# EAGLE board DDR5-96GB-RDIMM (EAGLE 9.6.2)
96GB DDR5 Registered DIMM — Final

Size 133.35 x 33.53 mm. Coordinates in mm from the lower left corner, seen from the top.
Outline: 0,0 133.35,0 133.35,33.53 0,33.53 0,0
Copper layers used: 

## Footprints (pad centres in the part's own frame; a part is rotated, then mirrored left to right if it is on the bottom)
0402 = smd 0.356 x 0.457: 1 -0.381,0; 2 0.381,0
0805 = smd 0.457 x 0.559: 1 -0.635,0; 2 0.635,0
DDR5-288_Edge_Connector = smd 0.508 x 1.016: ALERT_n 49.454,-0.254; ALERT_n 49.454,0.254; CA0 -23.47,-0.254; CA0 33.528,-0.254; CA0 -23.47,0.254; CA0 33.528,0.254; CA1 -22.631,-0.254; CA1 34.366,-0.254; CA1 -22.631,0.254; CA1 34.366,0.254; CA2 -21.793,-0.254; CA2 35.204,-0.254; CA2 -21.793,0.254; CA2 35.204,0.254; CA3 -20.955,-0.254; CA3 36.043,-0.254; CA3 -20.955,0.254; CA3 36.043,0.254; CA4 -20.117,-0.254; CA4 36.881,-0.254; CA4 -20.117,0.254; CA4 36.881,0.254; CA5 -19.279,-0.254; CA5 37.719,-0.254; CA5 -19.279,0.254; CA5 37.719,0.254; CA6 -18.44,-0.254; CA6 38.557,-0.254; CA6 -18.44,0.254; CA6 38.557,0.254; CA7 -17.602,-0.254; CA7 39.395,-0.254; CA7 -17.602,0.254; CA7 39.395,0.254; CA8 -16.764,-0.254; CA8 40.234,-0.254; CA8 -16.764,0.254; CA8 40.234,0.254; CA9 -15.926,-0.254; CA9 41.072,-0.254; CA9 -15.926,0.254; CA9 41.072,0.254; CA10 -15.088,-0.254; CA10 41.91,-0.254; CA10 -15.088,0.254; CA10 41.91,0.254; CA11 -14.249,-0.254; CA11 42.748,-0.254; CA11 -14.249,0.254; CA11 42.748,0.254; CA12 -13.411,-0.254; CA12 43.586,-0.254; CA12 -13.411,0.254; CA12 43.586,0.254; CA13 -12.573,-0.254; CA13 44.425,-0.254; CA13 -12.573,0.254; CA13 44.425,0.254; CK_c -10.058,-0.254; CK_c -9.22,-0.254; CK_c 46.939,-0.254; CK_c 47.777,-0.254; CK_c -10.058,0.254; CK_c -9.22,0.254; CK_c 46.939,0.254; CK_c 47.777,0.254; CK_t -11.735,-0.254; CK_t -10.897,-0.254; CK_t 45.263,-0.254; CK_t 46.101,-0.254; CK_t -11.735,0.254; CK_t -10.897,0.254; CK_t 45.263,0.254; CK_t 46.101,0.254; CKE0 -6.706,-0.254; CKE0 -6.706,0.254; CKE1 -5.867,-0.254; CKE1 -5.867,0.254; CS0_n -8.382,-0.254; CS0_n -8.382,0.254; CS1_n -7.544,-0.254; CS1_n -7.544,0.254; DM0 -25.146,-0.254; DM0 -25.146,0.254; DM1 -24.308,-0.254; DM1 -24.308,0.254; DM2 31.852,-0.254; DM2 31.852,0.254; DM3 32.69,-0.254; DM3 32.69,0.254; DQ0 -55.321,-0.254; DQ0 -55.321,0.254; DQ1 -54.483,-0.254; DQ1 -54.483,0.254; DQ2 -53.645,-0.254; DQ2 -53.645,0.254; DQ3 -52.807,-0.254; DQ3 -52.807,0.254; DQ4 -51.968,-0.254; DQ4 -51.968,0.254; DQ5 -51.13,-0.254; DQ5 -51.13,0.254; DQ6 -50.292,-0.254; DQ6 -50.292,0.254; DQ7 -49.454,-0.254; DQ7 -49.454,0.254; DQ8 -48.616,-0.254; DQ8 -48.616,0.254; DQ9 -47.777,-0.254; DQ9 -47.777,0.254; DQ10 -46.939,-0.254; DQ10 -46.939,0.254; DQ11 -46.101,-0.254; DQ11 -46.101,0.254; DQ12 -45.263,-0.254; DQ12 -45.263,0.254; DQ13 -44.425,-0.254; DQ13 -44.425,0.254; DQ14 -43.586,-0.254; DQ14 -43.586,0.254; DQ15 -42.748,-0.254; DQ15 -42.748,0.254; DQ16 -41.91,-0.254; DQ16 -41.91,0.254; DQ17 -41.072,-0.254; DQ17 -41.072,0.254; DQ18 -40.234,-0.254; DQ18 -40.234,0.254; DQ19 -39.395,-0.254; DQ19 -39.395,0.254; DQ20 -38.557,-0.254; DQ20 -38.557,0.254; DQ21 -37.719,-0.254; DQ21 -37.719,0.254; DQ22 -36.881,-0.254; DQ22 -36.881,0.254; DQ23 -36.043,-0.254; DQ23 -36.043,0.254; DQ24 -35.204,-0.254; DQ24 -35.204,0.254; DQ25 -34.366,-0.254; DQ25 -34.366,0.254; DQ26 -33.528,-0.254; DQ26 -33.528,0.254; DQ27 -32.69,-0.254; DQ27 -32.69,0.254; DQ28 -31.852,-0.254; DQ28 -31.852,0.254; DQ29 -31.013,-0.254; DQ29 -31.013,0.254; DQ30 -30.175,-0.254; DQ30 -30.175,0.254; DQ31 -29.337,-0.254; DQ31 -29.337,0.254; DQ32 1.676,-0.254; DQ32 1.676,0.254; DQ33 2.515,-0.254; DQ33 2.515,0.254; DQ34 3.353,-0.254; DQ34 3.353,0.254; DQ35 4.191,-0.254; DQ35 4.191,0.254; DQ36 5.029,-0.254; DQ36 5.029,0.254; DQ37 5.867,-0.254; DQ37 5.867,0.254; DQ38 6.706,-0.254; DQ38 6.706,0.254; DQ39 7.544,-0.254; DQ39 7.544,0.254; DQ40 8.382,-0.254; DQ40 8.382,0.254; DQ41 9.22,-0.254; DQ41 9.22,0.254; DQ42 10.058,-0.254; DQ42 10.058,0.254; DQ43 10.897,-0.254; DQ43 10.897,0.254; DQ44 11.735,-0.254; DQ44 11.735,0.254; DQ45 12.573,-0.254; DQ45 12.573,0.254; DQ46 13.411,-0.254; DQ46 13.411,0.254; DQ47 14.249,-0.254; DQ47 14.249,0.254; DQ48 15.088,-0.254; DQ48 15.088,0.254; DQ49 15.926,-0.254; DQ49 15.926,0.254; DQ50 16.764,-0.254; DQ50 16.764,0.254; DQ51 17.602,-0.254; DQ51 17.602,0.254; DQ52 18.44,-0.254; DQ52 18.44,0.254; DQ53 19.279,-0.254; DQ53 19.279,0.254; DQ54 20.117,-0.254; DQ54 20.117,0.254; DQ55 20.955,-0.254; DQ55 20.955,0.254; DQ56 21.793,-0.254; DQ56 21.793,0.254; DQ57 22.631,-0.254; DQ57 22.631,0.254; DQ58 23.47,-0.254; DQ58 23.47,0.254; DQ59 24.308,-0.254; DQ59 24.308,0.254; DQ60 25.146,-0.254; DQ60 25.146,0.254; DQ61 25.984,-0.254; DQ61 25.984,0.254; DQ62 26.822,-0.254; DQ62 26.822,0.254; DQ63 27.661,-0.254; DQ63 27.661,0.254; DQS0_t -28.499,-0.254; DQS0_t -27.661,-0.254; DQS0_t -28.499,0.254; DQS0_t -27.661,0.254; DQS1_c -26.822,-0.254; DQS1_c -25.984,-0.254; DQS1_c -26.822,0.254; DQS1_c -25.984,0.254; DQS2_t 28.499,-0.254; DQS2_t 29.337,-0.254; DQS2_t 28.499,0.254; DQS2_t 29.337,0.254; DQS3_c 30.175,-0.254; DQS3_c 31.013,-0.254; DQS3_c 30.175,0.254; DQS3_c 31.013,0.254; EVENT_n 50.292,-0.254; EVENT_n 50.292,0.254; HSA 52.807,-0.254; HSA 52.807,0.254; ODT0 -5.029,-0.254; ODT0 -5.029,0.254; ODT1 -4.191,-0.254; ODT1 -4.191,0.254; RESET_n 48.616,-0.254; RESET_n 48.616,0.254; SA0 53.645,-0.254; SA0 53.645,0.254; SA1 54.483,-0.254; SA1 54.483,0.254; SCL 51.968,-0.254; SCL 51.968,0.254; SDA 51.13,-0.254; SDA 51.13,0.254; VDD -58.674,-0.254; VDD -57.836,-0.254; VDD -1.676,-0.254; VDD 0.838,-0.254; VDD 56.998,-0.254; VDD 57.836,-0.254; VDD -58.674,0.254; VDD -57.836,0.254; VDD -1.676,0.254; VDD 0.838,0.254; VDD 56.998,0.254; VDD 57.836,0.254; VDDQ -56.998,-0.254; VDDQ -56.159,-0.254; VDDQ -3.353,-0.254; VDDQ -2.515,-0.254; VDDQ 55.321,-0.254; VDDQ 56.159,-0.254; VDDQ -56.998,0.254; VDDQ -56.159,0.254; VDDQ -3.353,0.254; VDDQ -2.515,0.254; VDDQ 55.321,0.254; VDDQ 56.159,0.254; VSS -60.35,-0.254; VSS -59.512,-0.254; VSS -0.838,-0.254; VSS 0,-0.254; VSS 58.674,-0.254; VSS 59.512,-0.254; VSS -60.35,0.254; VSS -59.512,0.254; VSS -0.838,0.254; VSS 0,0.254; VSS 58.674,0.254; VSS 59.512,0.254
1210 = smd 0.457 x 0.559: 1 -0.635,0; 2 0.635,0
1008 = smd 0.457 x 0.559: 1 -0.635,0; 2 0.635,0
BGA-48_DDR5_SDRAM = smd 0.406 x 0.406: CA0 -1.956,-0.381; CA1 -1.168,-0.381; CA2 -0.381,-0.381; CA3 0.406,-0.381; CA4 1.194,-0.381; CA5 1.981,-0.381; CA6 -1.956,0.406; CA7 -1.168,0.406; CA8 -0.381,0.406; CA9 0.406,0.406; CA10 1.194,0.406; CA11 1.981,0.406; CA12 -1.168,1.981; CA13 -0.381,1.981; CK_c -1.168,1.194; CK_t -1.956,1.194; CKE 0.406,1.194; CS -0.381,1.194; DM 0.406,-1.168; DQ0 -1.168,-2.743; DQ1 -0.381,-2.743; DQ2 0.406,-2.743; DQ3 1.194,-2.743; DQ4 -1.168,-1.956; DQ5 -0.381,-1.956; DQ6 0.406,-1.956; DQ7 1.194,-1.956; DQ8 -1.168,2.769; DQ9 -0.381,2.769; DQ10 0.406,2.769; DQ11 1.194,2.769; DQS_c -0.381,-1.168; DQS_t -1.168,-1.168; ODT 1.194,1.194; RESET 1.981,1.194; VDD -1.956,-2.743; VDD -1.956,-1.956; VDD -1.956,1.981; VDD -1.956,2.769; VDDQ -1.956,-1.168; VDDQ 1.981,-1.168; VPP 0.406,1.981; VSS 1.981,-2.743; VSS 1.981,-1.956; VSS 1.981,1.981; VSS 1.981,2.769; VSSQ 1.194,-1.168; ZQ 1.194,1.981
BGA-144_RCD02 = smd 0.406 x 0.406: ALERT_n 2.032,-1.016; BCOM 2.032,-0.254; CA_A0 -2.54,-2.54; CA_A1 -1.778,-2.54; CA_A2 -1.016,-2.54; CA_A3 -0.254,-2.54; CA_A4 0.508,-2.54; CA_A5 1.27,-2.54; CA_A6 2.032,-2.54; CA_B0 -2.54,-1.778; CA_B1 -1.778,-1.778; CA_B2 -1.016,-1.778; CA_B3 -0.254,-1.778; CA_B4 0.508,-1.778; CA_B5 1.27,-1.778; CA_B6 2.032,-1.778; CK_c0 -1.778,-1.016; CK_c1 -0.254,-1.016; CK_t0 -2.54,-1.016; CK_t1 -1.016,-1.016; CS0 0.508,-1.016; CS1 1.27,-1.016; DCS0_A -2.54,0.508; DCS0_B -1.016,0.508; DCS1_A -1.778,0.508; DCS1_B -0.254,0.508; QCA_A0 -1.778,1.27; QCA_A1 -1.016,1.27; QCA_A2 -0.254,1.27; QCA_A3 0.508,1.27; QCA_A4 1.27,1.27; QCA_A5 2.032,1.27; QCA_A6 -2.54,2.032; QCA_B0 -1.778,2.032; QCA_B1 -1.016,2.032; QCA_B2 -0.254,2.032; QCA_B3 0.508,2.032; QCA_B4 1.27,2.032; QCA_B5 2.032,2.032; QCA_B6 -2.54,2.54; QCK_c0 1.27,0.508; QCK_c1 -2.54,1.27; QCK_t0 0.508,0.508; QCK_t1 2.032,0.508; VDD -2.54,-0.254; VDD -1.778,-0.254; VDD 0.508,-0.254; VSS -1.016,-0.254; VSS -0.254,-0.254; VSS 1.27,-0.254
QFN-40_PMIC = smd 0.356 x 0.356: AGND 0.254,-1.016; PGND -1.27,-1.016; PGND -0.508,-1.016 | smd 0.356 x 0.508: EN 1.016,2.032; PVDD_A -0.508,-2.032; PVDD_B 0.254,-2.032; SCL -0.508,2.032; SDA -1.27,2.032; SMBALERT 0.254,2.032; VDD_OUT 1.016,-2.032; VDDQ_OUT 1.778,-2.032; VIN -2.032,-2.032; VIN -1.27,-2.032 | smd 2.032 x 2.032: EPAD 0,0 | smd 0.508 x 0.356: FB_VDD 2.032,-1.016; FB_VDDQ 2.032,0; FB_VPP 2.032,1.016; SW_A -2.032,0; SW_B -2.032,1.016; VPP_OUT -2.032,-1.016
TSSOP-8_SPD_Hub = smd 0.406 x 0.66: HSA 1.397,-0.635; SA0 -1.397,-1.905; SA1 -1.397,1.905; SCL -1.397,0.635; SDA -1.397,-0.635; VDD 1.397,-1.905; VSS 1.397,0.635; WP 1.397,1.905

## Placement (x,y rotation side)
C1  100nF  [0402]  4.83,14.35 0 top
C2  100nF  [0402]  6.35,14.35 0 top
C3  100nF  [0402]  15.93,14.35 0 top
C4  100nF  [0402]  17.45,14.35 0 top
C5  100nF  [0402]  27.03,14.35 0 top
C6  100nF  [0402]  28.55,14.35 0 top
C7  100nF  [0402]  38.13,14.35 0 top
C8  100nF  [0402]  39.65,14.35 0 top
C9  100nF  [0402]  49.23,14.35 0 top
C10  100nF  [0402]  50.75,14.35 0 top
C11  100nF  [0402]  60.33,14.35 0 top
C12  100nF  [0402]  61.85,14.35 0 top
C13  100nF  [0402]  71.42,14.35 0 top
C14  100nF  [0402]  72.95,14.35 0 top
C15  100nF  [0402]  82.52,14.35 0 top
C16  100nF  [0402]  84.05,14.35 0 top
C17  100nF  [0402]  93.62,14.35 0 top
C18  100nF  [0402]  95.15,14.35 0 top
C19  100nF  [0402]  104.72,14.35 0 top
C20  100nF  [0402]  106.25,14.35 0 top
C21  100nF  [0402]  115.82,14.35 0 top
C22  100nF  [0402]  117.35,14.35 0 top
C23  100nF  [0402]  126.92,14.35 0 top
C24  100nF  [0402]  128.45,14.35 0 top
C25  100nF  [0402]  4.83,14.35 0 bottom
C26  100nF  [0402]  6.35,14.35 0 bottom
C27  100nF  [0402]  15.93,14.35 0 bottom
C28  100nF  [0402]  17.45,14.35 0 bottom
C29  100nF  [0402]  27.03,14.35 0 bottom
C30  100nF  [0402]  28.55,14.35 0 bottom
C31  100nF  [0402]  38.13,14.35 0 bottom
C32  100nF  [0402]  39.65,14.35 0 bottom
C33  100nF  [0402]  49.23,14.35 0 bottom
C34  100nF  [0402]  50.75,14.35 0 bottom
C35  100nF  [0402]  60.33,14.35 0 bottom
C36  100nF  [0402]  61.85,14.35 0 bottom
C37  100nF  [0402]  71.42,14.35 0 bottom
C38  100nF  [0402]  72.95,14.35 0 bottom
C39  100nF  [0402]  82.52,14.35 0 bottom
C40  100nF  [0402]  84.05,14.35 0 bottom
C41  100nF  [0402]  93.62,14.35 0 bottom
C42  100nF  [0402]  95.15,14.35 0 bottom
C43  100nF  [0402]  104.72,14.35 0 bottom
C44  100nF  [0402]  106.25,14.35 0 bottom
C45  100nF  [0402]  115.82,14.35 0 bottom
C46  100nF  [0402]  117.35,14.35 0 bottom
C47  100nF  [0402]  126.92,14.35 0 bottom
C48  100nF  [0402]  128.45,14.35 0 bottom
C49  100nF  [0402]  62.48,7.87 0 top
C50  100nF  [0402]  70.87,7.87 0 top
C51  47nF  [0402]  62.48,12.45 0 top
C52  47nF  [0402]  70.87,12.45 0 top
C53  10uF  [0402]  53.34,13.84 0 top
C54  10uF  [0402]  57.4,7.62 0 top
C55  100nF  [0402]  49.28,12.7 0 top
C56  100nF  [0402]  57.4,12.7 0 top
C57  22uF  [0402]  37.85,8.38 0 top
C58  22uF  [0402]  37.85,10.92 0 top
C59  22uF  [0402]  37.85,13.46 0 top
C60  100nF  [0402]  78.74,13.84 0 top
C61  100nF  [0402]  80.52,13.84 0 top
C62  47uF  [0805]  47.24,6.6 0 top
C63  47uF  [0805]  53.34,6.1 0 top
C64  22uF  [0805]  41.15,8.38 0 top
C65  22uF  [0805]  41.15,10.92 0 top
C66  10uF  [0805]  35.31,12.19 0 top
J1  DDR5-288  [DDR5-288_Edge_Connector]  66.67,1.27 0 top
L1  470nH  [1210]  47.75,9.27 0 top
L2  470nH  [1210]  44.45,10.92 0 top
L3  1uH  [1008]  44.45,13.46 0 top
R1  2.2k  [0402]  74.93,6.35 0 top
R2  2.2k  [0402]  74.93,8.64 0 top
R3  10k  [0402]  60.45,7.62 0 top
R4  10k  [0402]  78.23,5.59 0 top
R5  0R  [0402]  85.09,6.35 0 top
R6  0R  [0402]  85.09,8.64 0 top
R7  47R  [0402]  86.36,13.21 0 top
R8  47R  [0402]  89.92,13.21 0 top
R9  47R  [0402]  93.47,12.06 0 top
R10  47R  [0402]  97.03,12.06 0 top
U1  4GB DDR5  [BGA-48_DDR5_SDRAM]  5.59,22.1 0 top
U2  4GB DDR5  [BGA-48_DDR5_SDRAM]  16.69,22.1 0 top
U3  4GB DDR5  [BGA-48_DDR5_SDRAM]  27.79,22.1 0 top
U4  4GB DDR5  [BGA-48_DDR5_SDRAM]  38.89,22.1 0 top
U5  4GB DDR5  [BGA-48_DDR5_SDRAM]  49.99,22.1 0 top
U6  4GB DDR5  [BGA-48_DDR5_SDRAM]  61.09,22.1 0 top
U7  4GB DDR5  [BGA-48_DDR5_SDRAM]  72.19,22.1 0 top
U8  4GB DDR5  [BGA-48_DDR5_SDRAM]  83.29,22.1 0 top
U9  4GB DDR5  [BGA-48_DDR5_SDRAM]  94.39,22.1 0 top
U10  4GB DDR5  [BGA-48_DDR5_SDRAM]  105.49,22.1 0 top
U11  4GB DDR5  [BGA-48_DDR5_SDRAM]  116.59,22.1 0 top
U12  4GB DDR5  [BGA-48_DDR5_SDRAM]  127.69,22.1 0 top
U13  4GB DDR5  [BGA-48_DDR5_SDRAM]  5.59,22.1 0 bottom
U14  4GB DDR5  [BGA-48_DDR5_SDRAM]  16.69,22.1 0 bottom
U15  4GB DDR5  [BGA-48_DDR5_SDRAM]  27.79,22.1 0 bottom
U16  4GB DDR5  [BGA-48_DDR5_SDRAM]  38.89,22.1 0 bottom
U17  4GB DDR5  [BGA-48_DDR5_SDRAM]  49.99,22.1 0 bottom
U18  4GB DDR5  [BGA-48_DDR5_SDRAM]  61.09,22.1 0 bottom
U19  4GB DDR5  [BGA-48_DDR5_SDRAM]  72.19,22.1 0 bottom
U20  4GB DDR5  [BGA-48_DDR5_SDRAM]  83.29,22.1 0 bottom
U21  4GB DDR5  [BGA-48_DDR5_SDRAM]  94.39,22.1 0 bottom
U22  4GB DDR5  [BGA-48_DDR5_SDRAM]  105.49,22.1 0 bottom
U23  4GB DDR5  [BGA-48_DDR5_SDRAM]  116.59,22.1 0 bottom
U24  4GB DDR5  [BGA-48_DDR5_SDRAM]  127.69,22.1 0 bottom
U25  RCD02  [BGA-144_RCD02]  66.67,10.16 0 top
U26  PMIC5100  [QFN-40_PMIC]  53.34,10.16 0 top
U27  SPD5118  [TSSOP-8_SPD_Hub]  80.01,10.16 0 top

## Library data of the parts
C1-C66 J1 L1-L3 R1-R10 U1-U27 = pcb-layout

## Nets
ALERT_n: J1.ALERT_n U25.ALERT_n
CAA0: U1.CA0 U2.CA0 U3.CA0 U4.CA0
CAA1: U1.CA1 U2.CA1 U3.CA1 U4.CA1
CAA2: U1.CA2 U2.CA2 U3.CA2 U4.CA2
CAA3: U1.CA3 U2.CA3 U3.CA3 U4.CA3
CAA4: U1.CA4 U2.CA4 U3.CA4 U4.CA4
CAA5: U1.CA5 U2.CA5 U3.CA5 U4.CA5
CAA6: U1.CA6 U2.CA6 U3.CA6 U4.CA6
CAA7: U1.CA7 U2.CA7 U3.CA7 U4.CA7
CAA8: U1.CA8 U2.CA8 U3.CA8 U4.CA8
CAA9: U1.CA9 U2.CA9 U3.CA9 U4.CA9
CAA10: U1.CA10 U2.CA10 U3.CA10 U4.CA10
CAA11: U1.CA11 U2.CA11 U3.CA11 U4.CA11
CAA12: U1.CA12 U2.CA12 U3.CA12 U4.CA12
CAA13: U1.CA13 U2.CA13 U3.CA13 U4.CA13
CAB0: U1.CA0 U2.CA0 U3.CA0 U4.CA0
CAB1: U1.CA1 U2.CA1 U3.CA1 U4.CA1
CAB2: U1.CA2 U2.CA2 U3.CA2 U4.CA2
CAB3: U1.CA3 U2.CA3 U3.CA3 U4.CA3
CAB4: U1.CA4 U2.CA4 U3.CA4 U4.CA4
CAB5: U1.CA5 U2.CA5 U3.CA5 U4.CA5
CAB6: U1.CA6 U2.CA6 U3.CA6 U4.CA6
CAB7: U1.CA7 U2.CA7 U3.CA7 U4.CA7
CAB8: U1.CA8 U2.CA8 U3.CA8 U4.CA8
CAB9: U1.CA9 U2.CA9 U3.CA9 U4.CA9
CAB10: U1.CA10 U2.CA10 U3.CA10 U4.CA10
CAB11: U1.CA11 U2.CA11 U3.CA11 U4.CA11
CAB12: U1.CA12 U2.CA12 U3.CA12 U4.CA12
CAB13: U1.CA13 U2.CA13 U3.CA13 U4.CA13
CB0: U1.DQ0 U2.DQ0
CB1: U1.DQ0 U2.DQ0
CB2: U1.DQ0 U2.DQ0
CB3: U1.DQ0 U2.DQ0
CB4: U1.DQ0 U2.DQ0
CB5: U1.DQ0 U2.DQ0
CB6: U1.DQ0 U2.DQ0
CB7: U1.DQ0 U2.DQ0
CK_A0_c: U1.CK_c U2.CK_c
CK_A0_t: U1.CK_t U2.CK_t
CK_A1_c: U1.CK_c U2.CK_c
CK_A1_t: U1.CK_t U2.CK_t
CK_B0_c: U1.CK_c U2.CK_c
CK_B0_t: U1.CK_t U2.CK_t
CK_B1_c: U1.CK_c U2.CK_c
CK_B1_t: U1.CK_t U2.CK_t
CKE0: J1.CKE0
CKE1: J1.CKE1
CS0_n: J1.CS0_n
CS1_n: J1.CS1_n
DM0: J1.DM0
DM1: J1.DM1
DM2: J1.DM2
DM3: J1.DM3
DM4: U1.DM U2.DM U3.DM U4.DM
DM5: U1.DM U2.DM U3.DM U4.DM
DM6: U1.DM U2.DM U3.DM U4.DM
DM7: U1.DM U2.DM U3.DM U4.DM
DQ0: U1.DQ0 U2.DQ0 U3.DQ0 U4.DQ0 U5.DQ0 U6.DQ0 U7.DQ0 U8.DQ0 U9.DQ0 U10.DQ0 U11.DQ0 U12.DQ0 U13.DQ0 U14.DQ0 U15.DQ0 U16.DQ0 U17.DQ0 U18.DQ0 U19.DQ0 U20.DQ0
DQ1: U1.DQ1 U2.DQ1 U3.DQ1 U4.DQ1 U5.DQ1 U6.DQ1 U7.DQ1 U8.DQ1 U9.DQ1 U10.DQ1 U11.DQ1 U12.DQ1 U13.DQ1 U14.DQ1 U15.DQ1 U16.DQ1 U17.DQ1 U18.DQ1 U19.DQ1 U20.DQ1
DQ2: U1.DQ2 U2.DQ2 U3.DQ2 U4.DQ2 U5.DQ2 U6.DQ2 U7.DQ2 U8.DQ2 U9.DQ2 U10.DQ2 U11.DQ2 U12.DQ2 U13.DQ2 U14.DQ2 U15.DQ2 U16.DQ2 U17.DQ2 U18.DQ2 U19.DQ2 U20.DQ2
DQ3: U1.DQ3 U2.DQ3 U3.DQ3 U4.DQ3 U5.DQ3 U6.DQ3 U7.DQ3 U8.DQ3 U9.DQ3 U10.DQ3 U11.DQ3 U12.DQ3 U13.DQ3 U14.DQ3 U15.DQ3 U16.DQ3 U17.DQ3 U18.DQ3 U19.DQ3 U20.DQ3
DQ4: U1.DQ4 U2.DQ4 U3.DQ4 U4.DQ4 U5.DQ4 U6.DQ4 U7.DQ4 U8.DQ4 U9.DQ4 U10.DQ4 U11.DQ4 U12.DQ4 U13.DQ4 U14.DQ4 U15.DQ4 U16.DQ4 U17.DQ4 U18.DQ4 U19.DQ4 U20.DQ4
DQ5: U1.DQ5 U2.DQ5 U3.DQ5 U4.DQ5 U5.DQ5 U6.DQ5 U7.DQ5 U8.DQ5 U9.DQ5 U10.DQ5 U11.DQ5 U12.DQ5 U13.DQ5 U14.DQ5 U15.DQ5 U16.DQ5 U17.DQ5 U18.DQ5 U19.DQ5 U20.DQ5
DQ6: U1.DQ6 U2.DQ6 U3.DQ6 U4.DQ6 U5.DQ6 U6.DQ6 U7.DQ6 U8.DQ6 U9.DQ6 U10.DQ6 U11.DQ6 U12.DQ6 U13.DQ6 U14.DQ6 U15.DQ6 U16.DQ6 U17.DQ6 U18.DQ6 U19.DQ6 U20.DQ6
DQ7: U1.DQ7 U2.DQ7 U3.DQ7 U4.DQ7 U5.DQ7 U6.DQ7 U7.DQ7 U8.DQ7 U9.DQ7 U10.DQ7 U11.DQ7 U12.DQ7 U13.DQ7 U14.DQ7 U15.DQ7 U16.DQ7 U17.DQ7 U18.DQ7 U19.DQ7 U20.DQ7
DQ8: U1.DQ8 U2.DQ8 U3.DQ8 U4.DQ8 U5.DQ8 U6.DQ8 U7.DQ8 U8.DQ8 U9.DQ8 U10.DQ8 U11.DQ8 U12.DQ8 U13.DQ8 U14.DQ8 U15.DQ8 U16.DQ8 U17.DQ8 U18.DQ8 U19.DQ8 U20.DQ8
DQ9: U1.DQ9 U2.DQ9 U3.DQ9 U4.DQ9 U5.DQ9 U6.DQ9 U7.DQ9 U8.DQ9 U9.DQ9 U10.DQ9 U11.DQ9 U12.DQ9 U13.DQ9 U14.DQ9 U15.DQ9 U16.DQ9 U17.DQ9 U18.DQ9 U19.DQ9 U20.DQ9
DQ10: U1.DQ10 U2.DQ10 U3.DQ10 U4.DQ10 U5.DQ10 U6.DQ10 U7.DQ10 U8.DQ10 U9.DQ10 U10.DQ10 U11.DQ10 U12.DQ10 U13.DQ10 U14.DQ10 U15.DQ10 U16.DQ10 U17.DQ10 U18.DQ10 U19.DQ10 U20.DQ10
DQ11: U1.DQ11 U2.DQ11 U3.DQ11 U4.DQ11 U5.DQ11 U6.DQ11 U7.DQ11 U8.DQ11 U9.DQ11 U10.DQ11 U11.DQ11 U12.DQ11 U13.DQ11 U14.DQ11 U15.DQ11 U16.DQ11 U17.DQ11 U18.DQ11 U19.DQ11 U20.DQ11
DQ12: J1.DQ12
DQ13: J1.DQ13
DQ14: J1.DQ14
DQ15: J1.DQ15
DQ16: J1.DQ16
DQ17: J1.DQ17
DQ18: J1.DQ18
DQ19: J1.DQ19
DQ20: J1.DQ20
DQ21: J1.DQ21
DQ22: J1.DQ22
DQ23: J1.DQ23
DQ24: J1.DQ24
DQ25: J1.DQ25
DQ26: J1.DQ26
DQ27: J1.DQ27
DQ28: J1.DQ28
DQ29: J1.DQ29
DQ30: J1.DQ30
DQ31: J1.DQ31
DQ32: J1.DQ32
DQ33: J1.DQ33
DQ34: J1.DQ34
DQ35: J1.DQ35
DQ36: J1.DQ36
DQ37: J1.DQ37
DQ38: J1.DQ38
DQ39: J1.DQ39
DQ40: J1.DQ40
DQ41: J1.DQ41
DQ42: J1.DQ42
DQ43: J1.DQ43
DQ44: J1.DQ44
DQ45: J1.DQ45
DQ46: J1.DQ46
DQ47: J1.DQ47
DQ48: J1.DQ48
DQ49: J1.DQ49
DQ50: J1.DQ50
DQ51: J1.DQ51
DQ52: J1.DQ52
DQ53: J1.DQ53
DQ54: J1.DQ54
DQ55: J1.DQ55
DQ56: J1.DQ56
DQ57: J1.DQ57
DQ58: J1.DQ58
DQ59: J1.DQ59
DQ60: J1.DQ60
DQ61: J1.DQ61
DQ62: J1.DQ62
DQ63: J1.DQ63
DQS0_c: U1.DQS_c U2.DQS_c
DQS0_t: J1.DQS0_t
DQS1_c: J1.DQS1_c
DQS1_t: U1.DQS_t U2.DQS_t
DQS2_c: U1.DQS_c U2.DQS_c
DQS2_t: J1.DQS2_t
DQS3_c: J1.DQS3_c
DQS3_t: U1.DQS_t U2.DQS_t
DQS4_c: U1.DQS_c U2.DQS_c
DQS4_t: U1.DQS_t U2.DQS_t
DQS5_c: U1.DQS_c U2.DQS_c
DQS5_t: U1.DQS_t U2.DQS_t
DQS6_c: U1.DQS_c U2.DQS_c
DQS6_t: U1.DQS_t U2.DQS_t
DQS7_c: U1.DQS_c U2.DQS_c
DQS7_t: U1.DQS_t U2.DQS_t
ODT0: J1.ODT0
ODT1: J1.ODT1
RESET_n: J1.RESET_n
SCL: J1.SCL U26.SCL U27.SCL
SDA: J1.SDA U26.SDA U27.SDA
VDD: U1.VDD U2.VDD U3.VDD U4.VDD U5.VDD
VDDQ: U1.VDDQ U2.VDDQ U3.VDDQ U4.VDDQ U5.VDDQ U6.VDDQ U7.VDDQ U8.VDDQ U9.VDDQ U10.VDDQ
VPP: U1.VPP U2.VPP U3.VPP U4.VPP U5.VPP U6.VPP U7.VPP U8.VPP U9.VPP U10.VPP U11.VPP U12.VPP U13.VPP U14.VPP U15.VPP U16.VPP U17.VPP U18.VPP U19.VPP U20.VPP
VSS: U1.VSS U2.VSS U3.VSS U4.VSS U5.VSS
VSSQ: U1.VSSQ U2.VSSQ U3.VSSQ U4.VSSQ U5.VSSQ U6.VSSQ U7.VSSQ U8.VSSQ U9.VSSQ U10.VSSQ U11.VSSQ U12.VSSQ U13.VSSQ U14.VSSQ U15.VSSQ U16.VSSQ U17.VSSQ U18.VSSQ U19.VSSQ U20.VSSQ